# Altium PCB IsoJTAG.PcbDoc
Units mm, origin at the board's own origin, x right, y up, seen from the top; angles counter-clockwise.
Board outline 57.81 x 56.76 mm, 2 copper layers (Top Layer, Bottom Layer), stack 1.571 mm thick; 85 components, 53 nets, 258 pads, 68 vias.
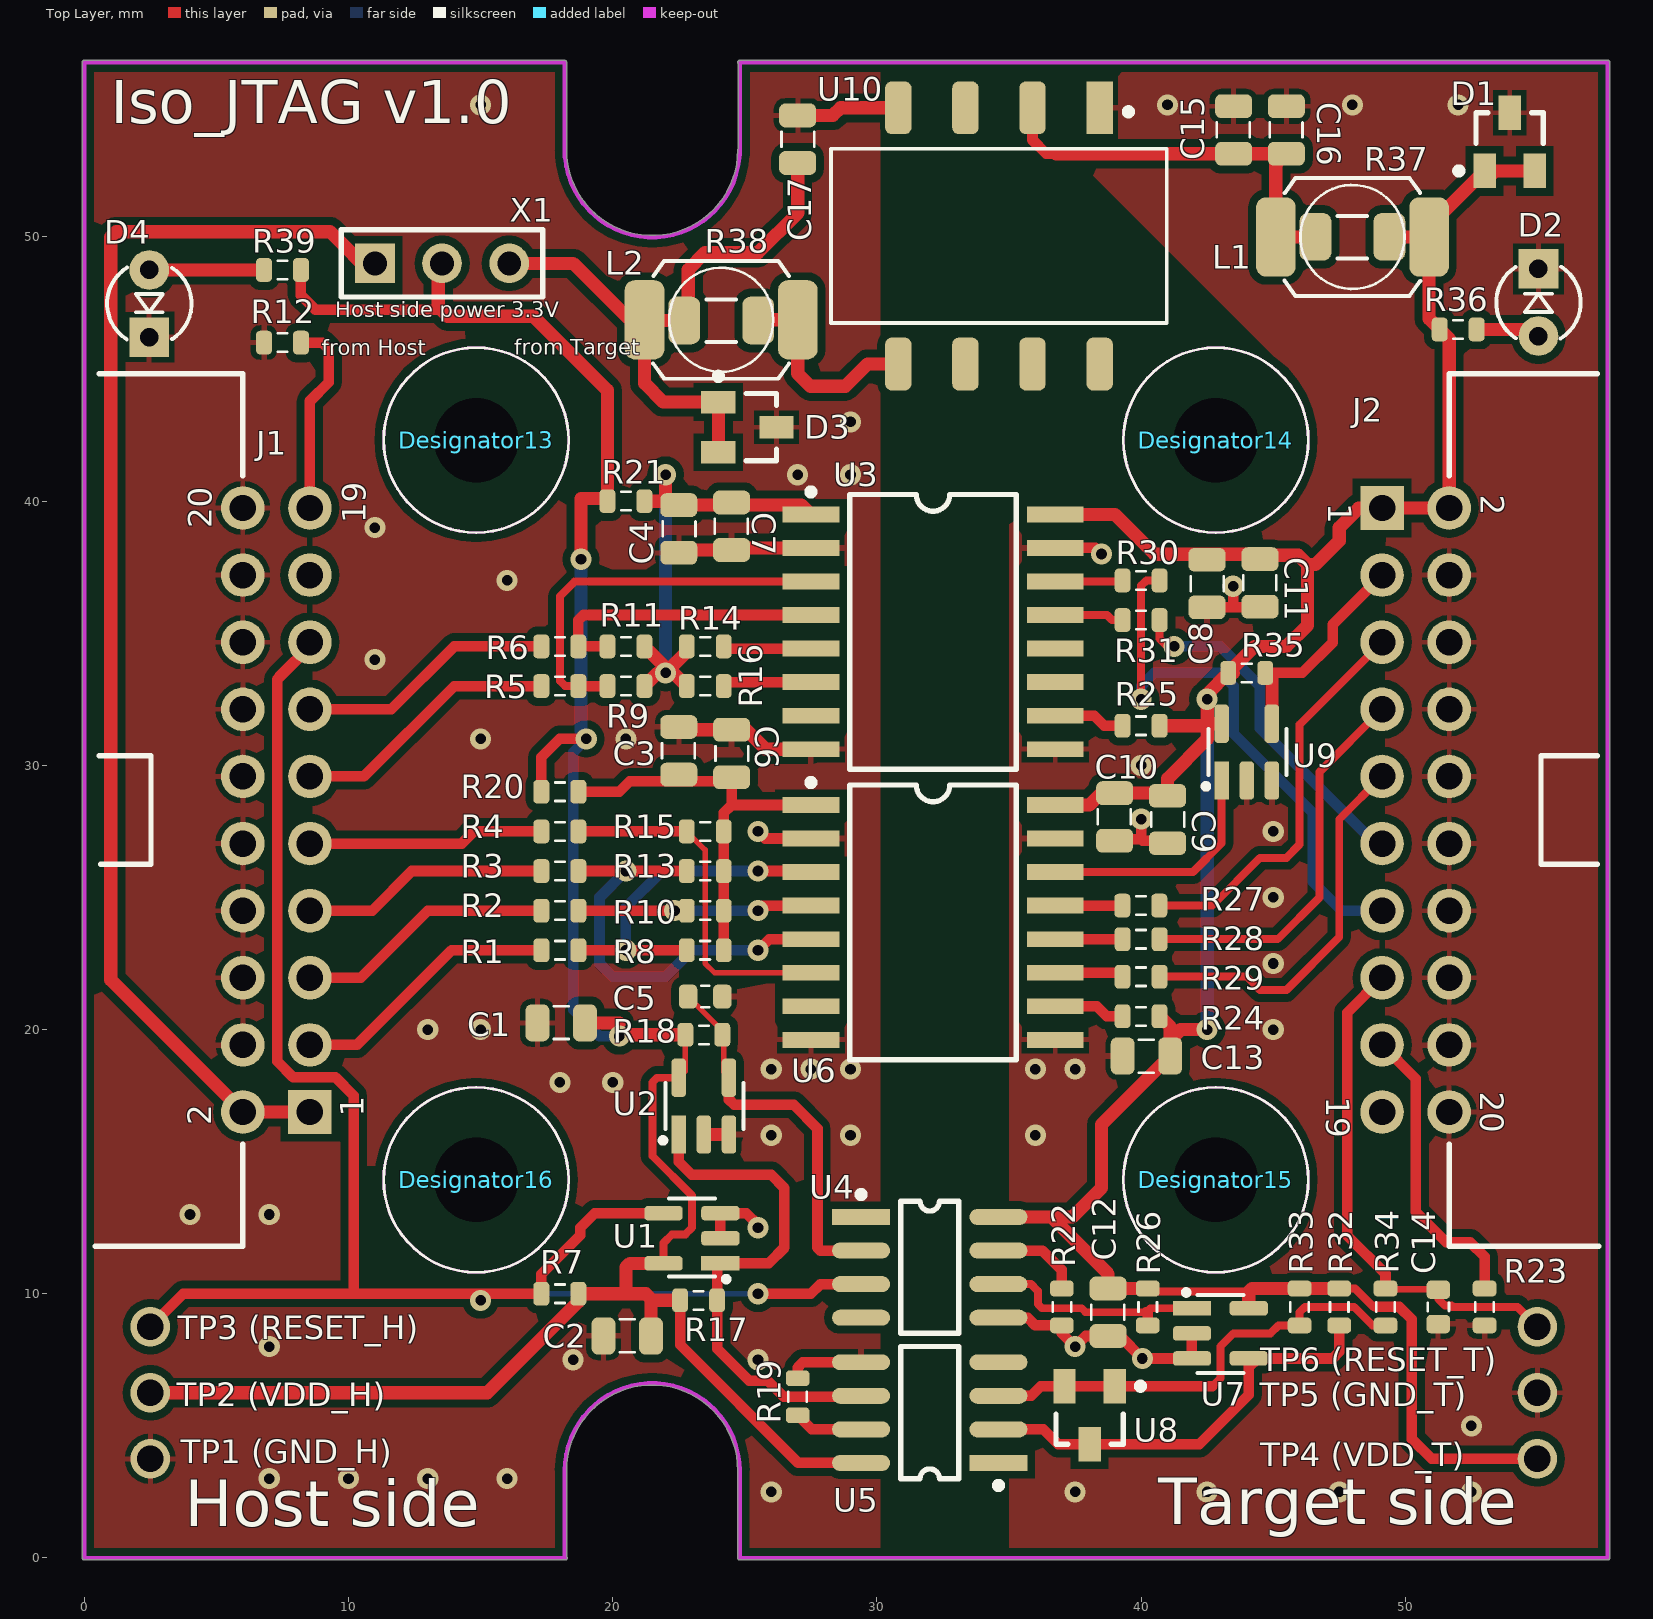
[diagram p0: Top Layer view]
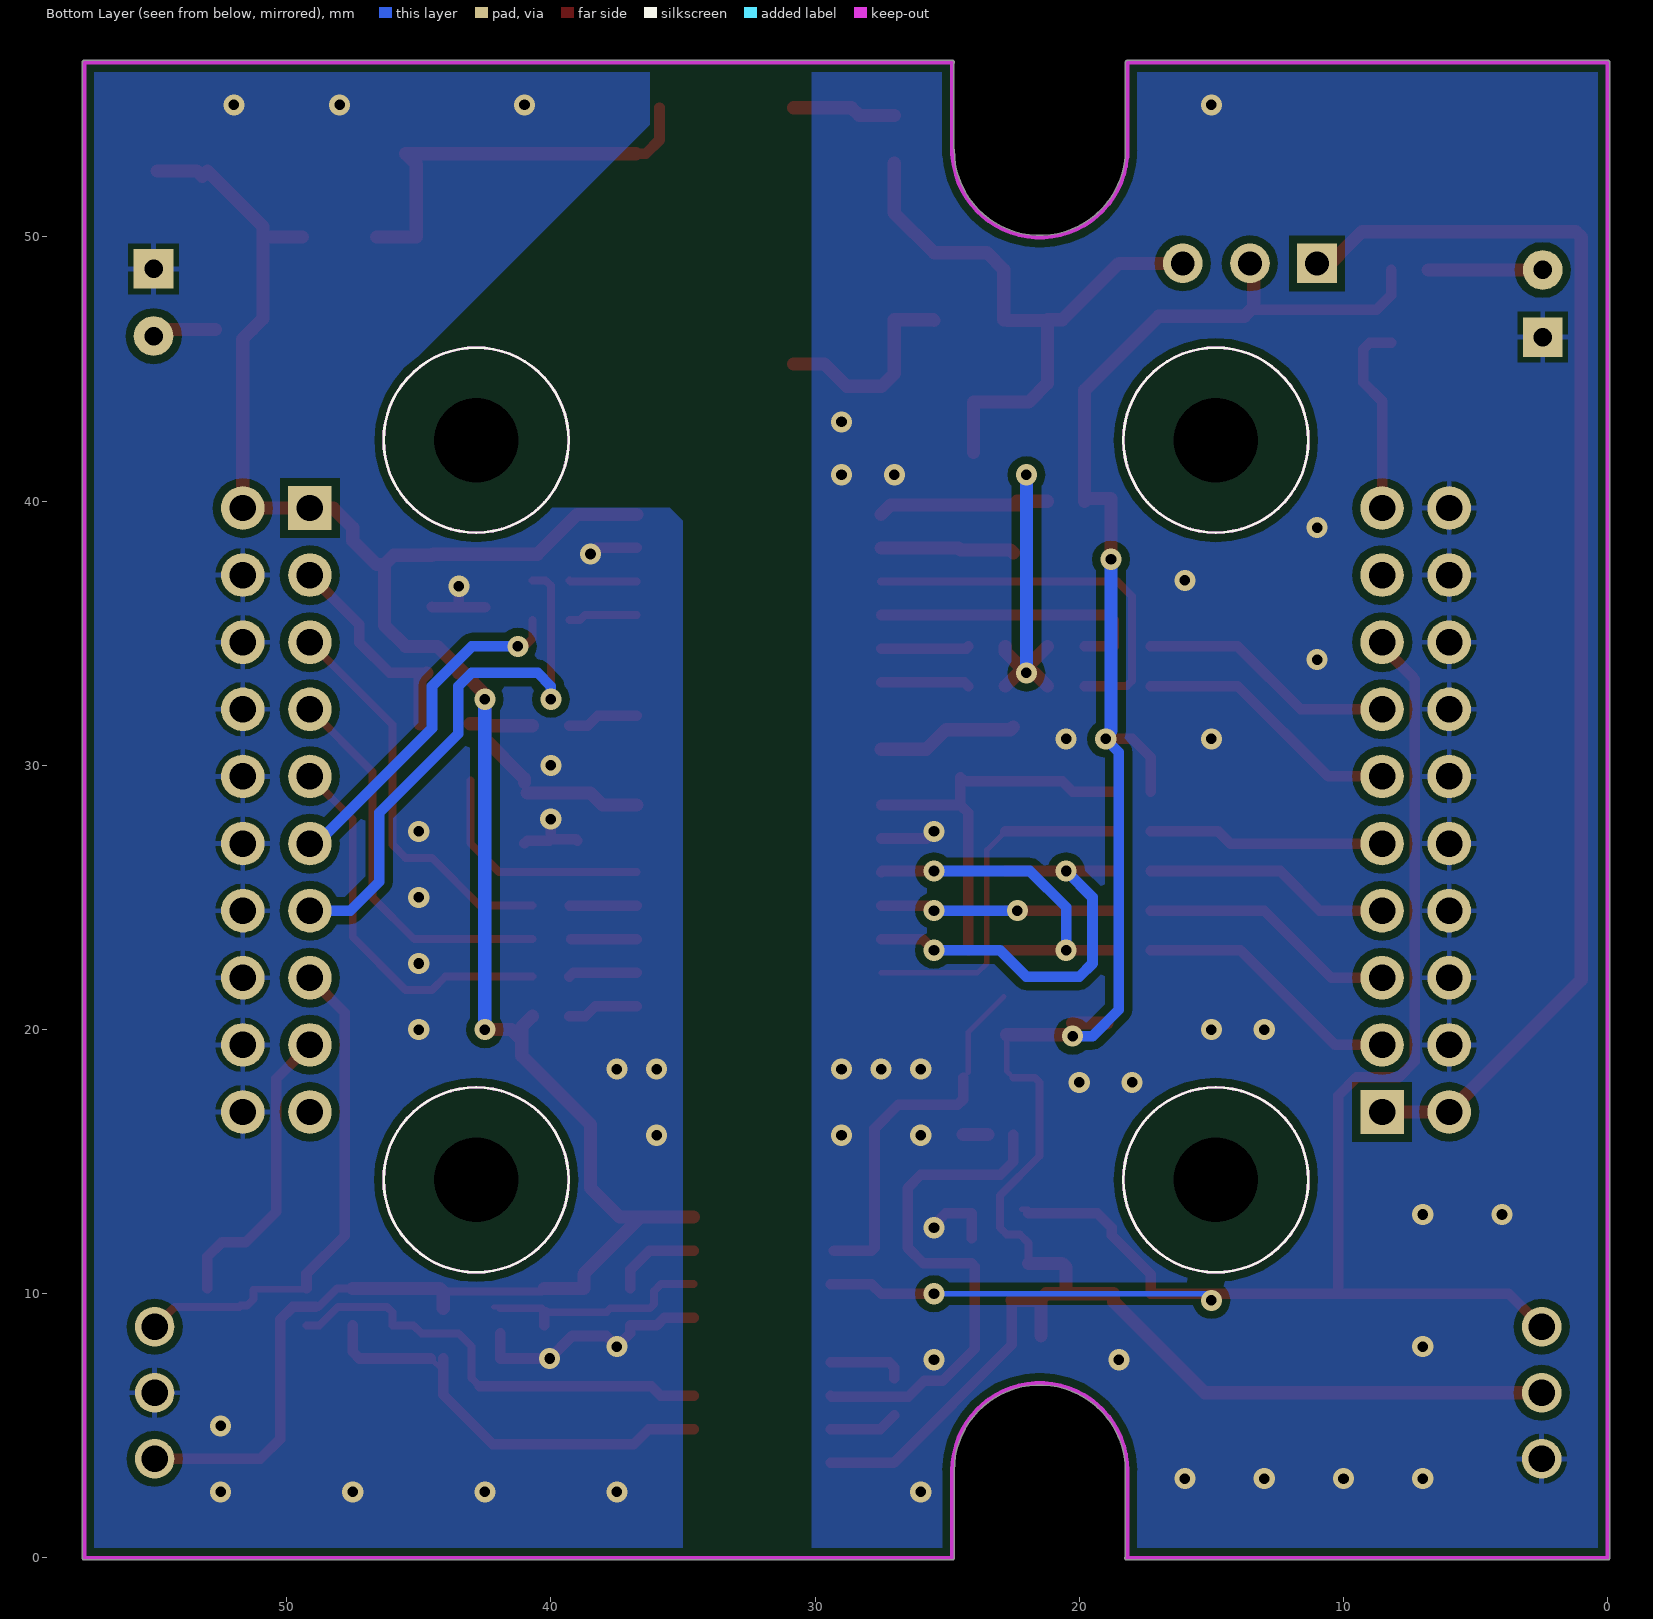
[diagram p1: Bottom Layer view, seen from below]
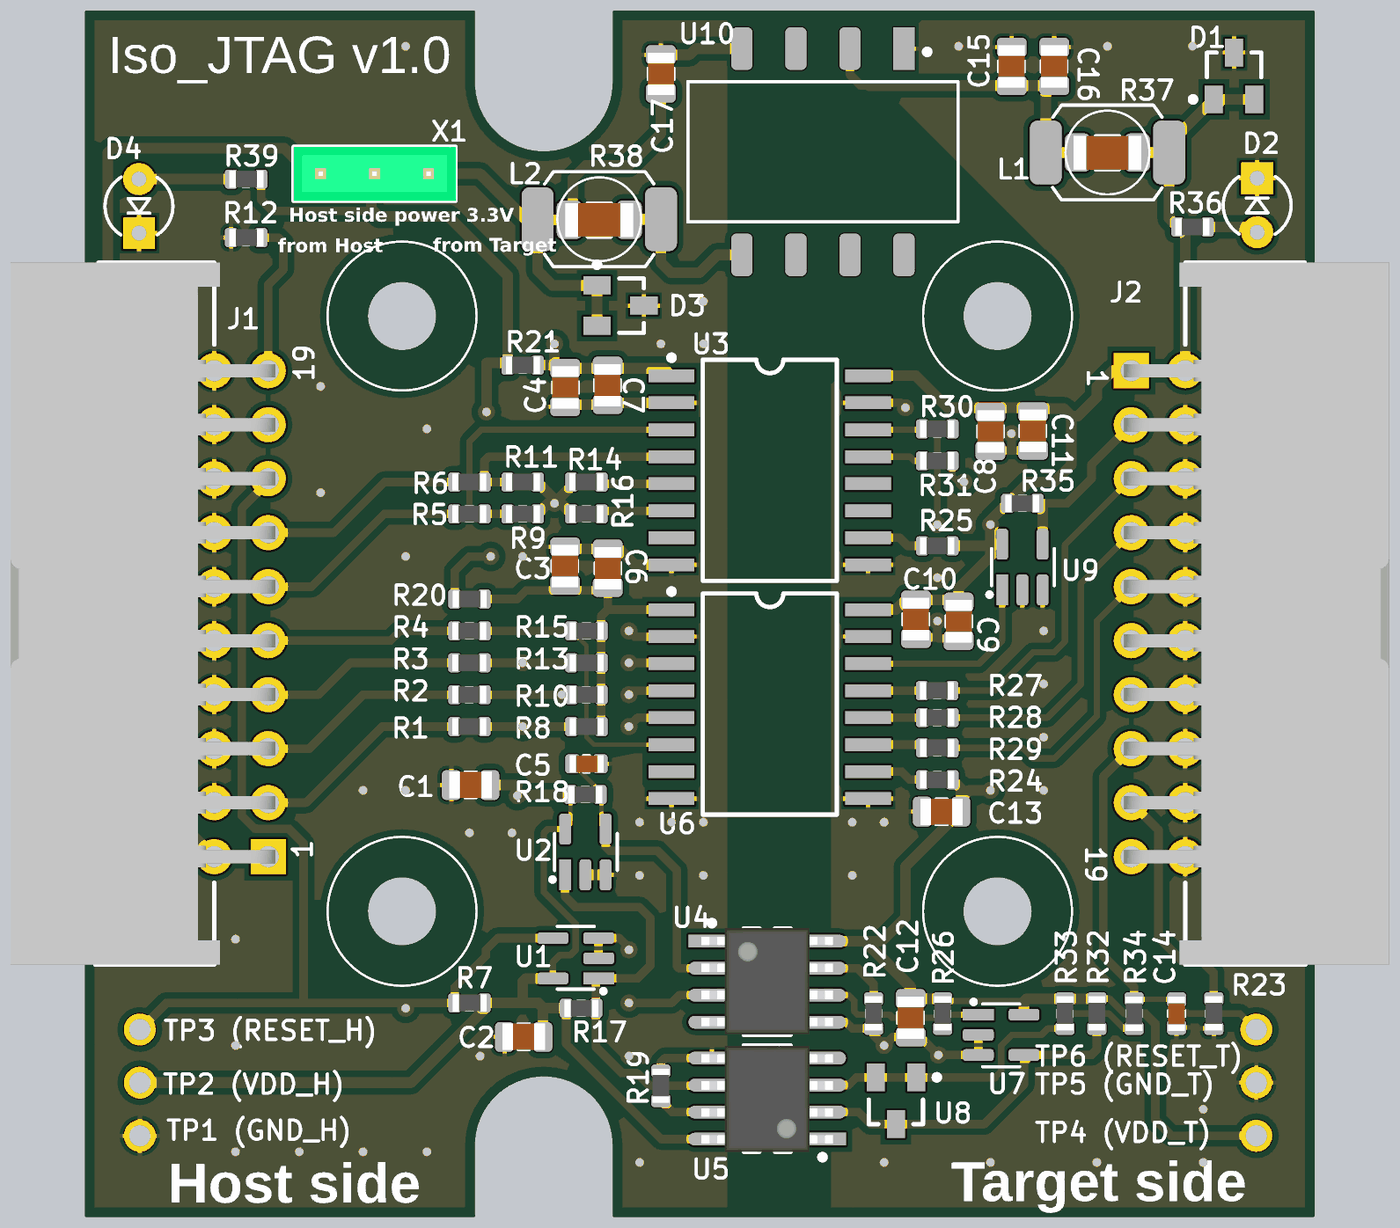
[diagram p2: 3D render of the assembled board from above, using the file's embedded part models]

## Layer stack, top to bottom
Top Solder: solder mask 0.0102, Solder Resist, Dk 3.5
Top Layer: signal copper 0.0356
Dielectric1: core 1.5, FR-4, Dk 4.8
Bottom Layer: signal copper 0.0356
Bottom Solder: solder mask 0.0102, Solder Resist, Dk 3.5

## Board outline
0,-0.075 cw(c0,0) -0.075,0 -0.075,56.61 cw(c0,56.61) 0,56.685 18.18,56.685 cw(c18.18,56.61) 18.255,56.61 18.255,53.295 ccw(c21.495,53.295) 24.735,53.295 cw(c24.81,53.295) 24.745,53.333 24.745,56.572 cw(c24.81,56.61) 24.81,56.685 57.66,56.685 cw(c57.66,56.61) 57.735,56.61 57.735,0 cw(c57.66,0) 57.66,-0.075 24.81,-0.075 cw(c24.81,0) 24.735,0 24.735,3.305 ccw(c24.81,3.305) 24.735,3.304 24.735,3.305 ccw(c21.495,3.305) 18.255,3.305 18.255,0.051 cw(c18.2,0) 18.275,0 cw(c18.2,0) 18.2,-0.075

## Design rules (kind name [scope] priority, off if disabled: settings)
Clearance Clearance_4 [InPolygon] p1: gap=0.3 ignorepadtopadclearanceinfootprint=FALSE except(0: Arc-Hole Track-Hole SMDPad-Hole THPad-Hole Via-Hole Fill-Hole Poly-Hole Region-Hole Text-Hole)
Clearance Clearance_1 [All vs OnLayer('Keep-Out Layer')] p2: gap=0.5 ignorepadtopadclearanceinfootprint=FALSE except(0: Arc-Hole Track-Hole SMDPad-Hole THPad-Hole Via-Hole Fill-Hole Poly-Hole Region-Hole Text-Hole)
Clearance Clearance_2 [InNamedPolygon('GND_H_BOT') vs InNamedPolygon('GND_T_BOT')] p3: gap=6 ignorepadtopadclearanceinfootprint=FALSE except(0: Arc-Hole Track-Hole SMDPad-Hole THPad-Hole Via-Hole Fill-Hole Poly-Hole Region-Hole Text-Hole)
Clearance Clearance_3 [InNamedPolygon('GND_H_TOP') vs InNamedPolygon('GND_T_TOP')] p4: gap=6 ignorepadtopadclearanceinfootprint=FALSE except(0: Arc-Hole Track-Hole SMDPad-Hole THPad-Hole Via-Hole Fill-Hole Poly-Hole Region-Hole Text-Hole)
Clearance [All] p5: gap=0.2 ignorepadtopadclearanceinfootprint=FALSE except(0: Arc-Hole Track-Hole SMDPad-Hole THPad-Hole Via-Hole Fill-Hole Poly-Hole Region-Hole Text-Hole)
ComponentClearance ComponentClearance_2 [InComponent('L2') vs InComponent('R38')] p1: gap=0 collisioncheckmode=3 verticalgap=0 showdistances=FALSE
ComponentClearance ComponentClearance_1 [InComponent('R37') vs InComponent('L1')] p2: gap=0 collisioncheckmode=3 verticalgap=0 showdistances=FALSE
ComponentClearance [All] p3: gap=0.254 collisioncheckmode=3 verticalgap=0.254 showdistances=FALSE
HoleSize [All] p1: absolutevalues=TRUE maxlimit=5 minlimit=0.3 maxpercent=80.000 minpercent=20.000
HoleToHoleClearance [All] p1: gap=0.3 allowstackedmicrovias=TRUE
MinimumSolderMaskSliver [All] p1: minsoldermaskwidth=0
PlaneConnect [All] p1: planeconnectstyle=Direct reliefexpansion=0.508 reliefentries=4 reliefconductorwidth=0.254 reliefairgap=0.254
PolygonConnect Via [IsVia] p1: connectstyle=Direct reliefconductorwidth=0.254 reliefentries=4 polygonreliefangle="90 Angle" airgapwidth=0.254
PolygonConnect [All] p2: connectstyle=Relief reliefconductorwidth=0.2 reliefentries=4 polygonreliefangle="90 Angle" airgapwidth=0.2
RoutingVias [All] p1: holewidth=0.4 width=0.8 viastyle="Through Hole" minholewidth=0.3 minwidth=0.7 maxholewidth=3 maxwidth=4
SilkToSilkClearance [All] p1: silktosilkclearance=0
SilkToSolderMaskClearance SilkscreenOverComponentPads [IsPad] p1: minsilkscreentomaskgap=0 clearancetoexposedcopper=TRUE
SolderMaskExpansion [All] p1: expansion=0.102 istentingtop=FALSE
Width [All] p1: maxlimit=5 minlimit=0.2 preferedwidth=0.3 minimp=50.000000 maximp=50.000000 favimp=50.000000
23 further rules are at their usual default settings.

## Components (designator, comment, footprint, x,y, rotation, side; value= is the part's Value field where it differs from the comment)
C1 "0.1 uF" 2012[0805] 18,20.25 r180 top
C2 "0.1 uF" 2012[0805] 20.5,8.4 r180 top
C3 "0.1 uF" 2012[0805] 22.5,30.5 r270 top
C4 "0.1 uF" 2012[0805] 22.5,39 r90 top
C5 "100 pF" 1608[0603] 23.5,21.25 r0 top
C6 "1 uF" 2012[0805] 24.5,30.5 r90 top
C7 "1 uF" 2012[0805] 24.5,39 r270 top
C8 "0.1 uF" 2012[0805] 42.494,36.932 r90 top
C9 "0.1 uF" 2012[0805] 41,28 r90 top
C10 "1 uF" 2012[0805] 39,28 r270 top
C11 "1 uF" 2012[0805] 44.501,36.855 r270 top
C12 "0.1 uF" 2012[0805] 38.75,9.25 r270 top
C13 "0.1 uF" 2012[0805] 40.25,19 r0 top
C14 "10 pF" 1608[0603] 51.25,9.5 r270 top
C15 "0.1 uF" 2012[0805] 43.5,54 r270 top
C16 "10 uF" 2012[0805] 45.5,54 r270 top
C17 "10 uF" 2012[0805] 27,53.75 r90 top
D1 "ESDA6V1L" SOT23 53,52.5 r0 top
D2 "LTL-4221N" "LED 3 mm" 52.5,46.25 r270 top
D3 "ESDA6V1L" SOT23 24,43.75 r270 top
D4 "LTL-4221N" "LED 3 mm" 5,48.75 r90 top
Designator13 "Comment" Hole_3mm 14.83,42.31 r0 top locked
Designator14 "Comment" Hole_3mm 42.83,42.31 r0 top locked
Designator15 "Comment" Hole_3mm 42.83,14.31 r0 top locked
Designator16 "Comment" Hole_3mm 14.83,14.31 r0 top locked
J1 "20pin header RA" 918520X323 6,28.31 r90 top locked
J2 "20pin header RA" 918520X323 51.66,28.31 r270 top locked
L1 "DL16-10" DL16-10 48,50 r180 top
L2 "DL16-10" DL16-10 24.105,46.863 r180 top
R1 "49.9 R" 0603 18,23 r180 top
R2 "49.9 R" 0603 18,24.5 r180 top
R3 "49.9 R" 0603 18,26 r180 top
R4 "49.9 R" 0603 18,27.5 r180 top
R5 "49.9 R" 0603 18,33 r180 top
R6 "49.9 R" 0603 18,34.5 r180 top
R7 "10 K" 0603 18,10 r0 top
R8 "10 K" 0603 23.5,23 r0 top
R9 "10 K" 0603 20.5,33 r0 top
R10 "10 K" 0603 23.5,24.5 r0 top
R11 "10 K" 0603 20.5,34.5 r0 top
R12 "10 K" 0603 7.5,46 r0 top
R13 "10 K" 0603 23.5,26 r0 top
R14 "10 K" 0603 23.5,34.5 r180 top
R15 "10 K" 0603 23.5,27.5 r0 top
R16 "10 K" 0603 23.5,33 r180 top
R17 "2.2 K" 0603 23.25,9.75 r0 top
R18 "2.2 K" 0603 23.45,19.8 r180 top
R19 "100 K" 0603 27,6.1 r90 top
R20 "49.9 R" 0603 18,29 r0 top
R21 "49.9 R" 0603 20.5,40 r0 top
R22 "100 K" 0603 37,9.5 r90 top
R23 "10 K" 0603 53,9.5 r90 top
R24 "10 K" 0603 40,20.5 r180 top
R25 "10 K" 0603 40,31.5 r180 top
R26 "2.2 K" 0603 40.25,9.5 r90 top
R27 "49.9 R" 0603 39.99,24.69 r180 top
R28 "49.9 R" 0603 40,23.42 r180 top
R29 "49.9 R" 0603 40,22 r180 top
R30 "49.9 R" 0603 40,37 r180 top
R31 "49.9 R" 0603 40,35.5 r180 top
R32 "2.2 K" 0603 47.5,9.5 r90 top
R33 "10 K" 0603 46,9.5 r90 top
R34 "33 R" 0603 49.25,9.5 r270 top
R35 "2.2 K" 0603 44,33.5 r180 top
R36 "RL0603E510-1" 0603 52,46.5 r180 top
R37 "ERJ-8RSFR15V" 3216[1206] 48,50 r0 top
R38 "ERJ-8RSFR15V" 3216[1206] 24.105,46.838 r0 top
R39 "RL0603E510-1" 0603 7.5,48.75 r0 top
"TP1 (GND_H)" "TP 0.4-0.8" "TP 0.4-0.8"#1 2.5,3.75 r0 top (schematic designator TP1)
"TP2 (VDD_H)" "TP 0.4-0.8" "TP 0.4-0.8"#2 2.5,6.5 r0 top (schematic designator TP2)
"TP3 (RESET_H)" "TP 0.4-0.8" "TP 0.4-0.8"#1 2.5,8.75 r0 top (schematic designator TP3)
"TP4 (VDD_T)" "TP 0.4-0.8" "TP 0.4-0.8"#1 55,3.75 r0 top (schematic designator TP4)
"TP5 (GND_T)" "TP 0.4-0.8" "TP 0.4-0.8"#1 55,6.25 r0 top (schematic designator TP5)
"TP6 (RESET_T)" "TP 0.4-0.8" "TP 0.4-0.8"#1 55,8.75 r0 top (schematic designator TP6)
U1 "74V1G125STR" SOT23-5L 23,12.1 r90 top
U2 "74V1G125STR" SOT23-5L 23.45,17.1 r0 top
U3 "SI8440BB-D-IS" SO-G16/D10.4 27.5,39.5 r270 top
U4 "HCPL-0701-000E" SO-8 32,11 r270 top
U5 "HCPL-0701-000E" SO-8 32,5.5 r90 top
U6 "SI8440BB-D-IS" SO-G16/D10.4 27.5,28.5 r270 top
U7 "74V1G125STR" SOT23-5L 43,8.5 r270 top
U8 "BAR42FILM" SOT23 39,6.5 r180 top
U9 "74V1G125STR" SOT23-5L 44,30.5 r0 top
U10 "NTE0303MC" "NTE DC_DC" 34.62,50.038 r180 top
X1 "Pin header 1X3" HDR1X3 11,49 r0 top

## Footprints (in the part's own frame and the unit in brackets; to place one, negate y for a bottom-side part, rotate by r counter-clockwise, add the part's x,y. Pads: shape width x height; smd on the part's side, far side on the other; paste and mask are expansions set on the pad)
0603 [mm] "Chip Resistor; Body 1.6 x 0.8 mm (LxW typ)"
  rrect50% 0.6x0.9 smd mask+0.06: 1(-0.7,0) 2(0.7,0)
  silkscreen extent -0.18,-0.35 0.18,0.35, body extent -0.79,-0.4 0.81,0.4, height 0.45
1608[0603] [mm] "Chip Capacitor; Body 1.6 x 0.8 mm (LxW typ)"
  rrect50% 0.7x0.9 smd mask+0.05: 1(-0.65,0) 2(0.65,0)
  silkscreen extent -0.15,-0.41 0.15,0.41, body extent -0.79,-0.41 0.81,0.39, height 0.8
2012[0805] [mm] "Chip Capacitor; Body 2.0 x 1.2 mm (LxW typ)"
  rrect50% 0.9x1.4 smd mask+0.07: 1(-0.95,0) 2(0.85,0)
  silkscreen extent -0.33,-0.64 0.23,0.61, body extent -1.05,-0.64 0.95,0.62, height 1.25
3216[1206] [mm] "Chip Capacitor; Body 3.2 x 1.6 mm (LxW typ)"
  rrect50% 1.2x1.8 smd: 1(-1.4,0) 2(1.4,0)
  silkscreen extent -0.56,-0.81 0.56,0.79, body extent -1.6,-0.81 1.6,0.79, height 1.15
918520X323 [mm] "Connector; IDC, Low Profile Male Header, Thru-Hole; 20 Position; Right Angle; Pitch 2.54 mm; Body 33.02 x 8.9 x 9.2 mm (LxWxH)"
  rect 1.65x1.65 hole 1: 1(-11.43,-2.54)
  round 1.65 hole 1: 2(-11.43,0) 3(-8.89,-2.54) 4(-8.89,0) 5(-6.35,-2.54) 6(-6.35,0) 7(-3.81,-2.54) 8(-3.81,0) 9(-1.27,-2.54) 10(-1.27,0) 11(1.27,-2.54) 12(1.27,0) 13(3.81,-2.54) 14(3.81,0) 15(6.35,-2.54) 16(6.35,0) 17(8.89,-2.54) 18(8.89,0) 19(11.43,-2.54) 20(11.43,0)
  silkscreen extent -16.51,0 16.51,5.59, body extent -16.51,-2.88 16.51,9.58, height 9.17
DL16-10 [mm] "Inductor 6.6x4.45x2.92mm"
  rrect50% 1.5x3 smd: 1(-2.9,0) 2(2.9,0)
  silkscreen extent -2.57,-2.23 2.58,2.23, body extent -3.3,-2.23 3.3,2.23, height 2.92
HDR1X3 [mm] "Connector; Header; 3 Position"
  rect 1.5x1.5 hole 0.9: 1(0,0)
  round 1.5 hole 0.9: 2(2.54,0) 3(5.08,0)
  silkscreen extent -1.27,-1.27 6.35,1.27, body extent -1.27,-1.27 6.35,1.27, height 9
Hole_3mm [mm]
  round 3 hole 3.2 unplated: 0(0,0)
  Keep-Out Layer circle w0.1: c0,0 r3.5
  silkscreen extent -3.5,-3.5 3.5,3.5
"LED 3 mm" [mm] "LED Diffuse Red 8,7mcd 60° 3mm"
  rect 1.5x1.5 hole 0.7: 1(-2.54,2.54)
  round 1.5 hole 0.7: 2(0,2.54)
  silkscreen extent -2.62,0.94 0.09,4.14
"NTE DC_DC" [mm] "DC_DC 8 pin 12.7*11.20mm"
  rect 1x2 smd mask+0.06: 1(-3.81,-4.85)
  rrect50% 1x2 smd mask+0.06: 3(-1.27,-4.85) 5(1.27,-4.85) 7(3.81,-4.85) 8(3.81,4.85) 10(1.27,4.85) 12(-1.27,4.85) 14(-3.81,4.85)
  silkscreen extent -6.35,-4.82 6.35,3.3, body extent -6.35,-3.3 6.35,3.3, height 6.6
SO-8 [mm] "Small Outline; 8 Leads; Body Width 3.9 mm; Pitch 1.27 mm"
  rect 0.6x2.2 smd: 1(-1.905,-2.6)
  oval 0.6x2.2 smd: 2(-0.635,-2.6) 3(0.635,-2.6) 4(1.905,-2.6) 5(1.905,2.6) 6(0.635,2.6) 7(-0.635,2.6) 8(-1.905,2.6)
  silkscreen extent -2.88,-2.72 2.5,1.1, body extent -2.51,-3.09 2.49,3.09, height 2.16
SO-G16/D10.4 [mm] "Plastic Small Outline; 16 Leads; Body Width 7.5 mm"
  rect 0.6x2.15 smd: 1(0,0) 2(1.27,0) 3(2.54,0) 4(3.81,0) 5(5.08,0) 6(6.35,0) 7(7.62,0) 8(8.89,0) 9(8.89,9.25) 10(7.62,9.25) 11(6.35,9.25) 12(5.08,9.25) 13(3.81,9.25) 14(2.54,9.25) 15(1.27,9.25) 16(0,9.25)
  silkscreen extent -0.97,-0.12 9.64,7.77, body extent -0.76,1.14 9.65,8.13, height 1.5
SOT23 [mm] "SOT-23; 3 Leads; Body 3.0 x 2.6 mm, inc. leads (LxW max)"
  rect 0.85x1.3 smd: 1(0,0) 2(1.9,0) 3(0.95,2.2)
  silkscreen extent -1.1,-0.12 2.23,2.2, body extent -0.3,1 2.2,2.2, height 1
SOT23-5L [mm] "5 Leads; Body 3x3mm, inc. leads (LxW max)"
  rect 0.55x1.45 smd: 1(-0.95,-1.075)
  rrect50% 0.55x1.45 smd: 2(0,-1.075) 3(0.95,-1.075) 4(0.95,1.075) 5(-0.95,1.075)
  silkscreen extent -1.65,-1.4 1.5,0.87, body extent -1.5,-0.86 1.5,0.86, height 1.45
"TP 0.4-0.8"#1 [mm]
  round 1.5 hole 1 mask+0.05: 1(0,0)
"TP 0.4-0.8"#2 [mm]
  round 1.5 hole 1 mask+0.05: 1(0,-0.25)

## Part data
C1 C2 C3 C4 C8 C9 C12 C13 C15: library part "0805, 0.1 uF, 50 V, X7R", "0.1 uF, X7R,  0805"
C5: library part CCPF100K0603, "100 pF, 50V, 5%, NP0, 0603 SMD MLC Capacitor"
C6 C7 C10 C11: library part CVUF001K0805, "1 uF, 16V, 10%, X7R, 0805"
C14: library part CCPF010K0603, "10 pF, 50V, 5%, NP0, 0603 SMD MLC Capacitor"
C16 C17: library part GRM21BR61A106KE19L, "10 uF, 10V, X5R, 10%, 0805,  -55°C..85°C"
D1 D3: "Dual transil array for ESD, 6.1 V, 300 W"
D2 D4: "LED 3 mm"
J1 J2: library part "2-1634689-0 20pin header", "Socket; IDC; male; PIN:20; angled; THT; 1.27mm; Pitch:2.54mm"
L1 L2: library part "DL16-10 10uH", "Inductor: wire; 10uH; Ioper:1.1A; 0.16R; SMD; Isat:1.1A; B:4.45mm"
R1 R2 R3 R4 R5 R6 R20 R21 R27 R28 R29 R30 R31: library part CRCW060349R9FKEA, "49.9 R, 1%, 0.1 W, 0603, SMD Resistor, Taped"
R7 R8 R9 R10 R11 R12 R13 R14 R15 R16 R23 R24 R25 R33: library part RL0603K010-1, "10 K, 1%, 0603, SMD Resistor, Taped"
R17 R18 R26 R32 R35: library part RL0603K002.2-1, "2.2 K, 1%, 0603, SMD Resistor, Taped"
R19 R22: library part RL0603K100-1, "100 K, 1%, 0603, SMD Resistor, Taped"
R34: library part RL0603E033-1, "33 R, 1%, 0603, SMD Resistor, Taped"
R36 R39: "510 R, 1%, 0603, SMD Resistor, Taped"
R37 R38: "0.15 Ohm, 0.25 W, 1% 1206"
U1 U2 U7 U9: library part "74V1G125STR buffer", "Single Bus Buffer (3-State), Non Inverting, 2-5.5V, SOT-23-5, -55-125C,"
U3 U6: library part SI8440AB-D-IS, "IC ISOLATOR 4CH 5.5V 16-SOIC"
U4 U5: "OPTOCOUPLER, SMD, TRANSISTOR O/P"
U8: "Schottky Single 30V, 100 mA, 400mV, SOT-23, Marking D94"
U10: library part "NTE0303MC DC/DC", "CONVERTER, DC/DC, SMD, 1W, 3.3V,  12,7x6.6x7.7mm, 1kV isol"

## Via types
v1: diameter 0.8, hole 0.4, Top Layer to Bottom Layer, tented both sides, 68 vias

## Nets (pads, with @x,y where several pads share a name; then routed paths per layer and width w, separated by ;. In a path a pad name is that pad's centre, name@x,y a point inside that pad or via, vN(x,y) a via of type N, cw(c..) or ccw(c..) an arc to the next point about the centre after c; other vN are vias at no path point)
GND_H: "TP1 (GND_H).1" C1.2 C2.2 C3.1 C4.1 C5.2 C6.2 C7.2 C17.2 D3.3 D4.1 J1.4 J1.6 J1.8 J1.10 J1.12 J1.14 J1.16 J1.18 J1.20 R12.1 R19.2 U1.2 U1.3 U2.2 U2.3 U3.2 U3.8 U5.5 U6.2 U6.8 U10.7 | length 23
  Top Layer w0.4: U1.2 U1.3 25.05,13.05 25.5,12.6 v1(25.5,12.5) ; v1(25.5,27.5) 25.77,27.23 U6.2 ; R19.2 27,7.207 27.198,7.405 U5.5
  Top Layer w0.5: C3.1 22.6,31.35 C6.2 25.05,31.35 25.79,30.61 U3.8 ; C4.1 22.6,38.15 C7.2 24.58,38.23 U3.2 ; U2.2 U2.3 ; C17.2 28.336,54.6 28.624,54.888 U10.7
  other v1: 26,2.5 7,3 10,3 13,3 16,3 18.5,7.5 25.5,7.5 7,8 4,13 7,13 26,16 29,16 18,18 20,18 26,18.5 27.5,18.5 29,18.5 13,20 15,20 15,31 20.5,31 11,34 16,37 11,39 27,41 29,41 29,43 15,55
GND_T: "TP5 (GND_T).1" C8.1 C9.1 C10.2 C11.2 C12.2 C13.1 C14.2 C15.1 C16.1 D1.3 D2.1 J2.4 J2.6 J2.8 J2.10 J2.12 J2.14 J2.16 J2.18 J2.20 R22.1 R23.1 U3.9 U3.15 U4.5 U6.9 U6.15 U7.2 U7.3 U9.2 U9.3 U10.1 | length 16.9
  Top Layer w0.4: U4.5 35.705,9.095 36,8.8 R22.1 37,8.5 v1(37.5,8) 37.9,8.4 C12.2 39.2,8.4 v1(40.05,7.55) U7.3 U7.2 ; U3.15 38.27,38.23 v1(38.5,38) ; C10.2 39.051,27.201 40.005,27.201 ; v1(40.005,27.965) 40.005,27.201 ; C9.1 40.9,27.15 40.056,27.15 40.005,27.201 ; C8.1 43.51,35.982 ; v1(43.485,36.779) 43.485,36.007 43.51,35.982 ; C11.2 44.477,35.982 43.51,35.982
  other v1: 37.5,2.5 42.5,2.5 47.5,2.5 52.5,2.5 52.5,5 36,16 36,18.5 37.5,18.5 45,20 45,22.5 45,25 45,27.5 40,30 41,55 48,55 52,55
NetC3_2: C3.2 C6.1 R8.2 R10.2 R13.2 R15.2 R20.2 U6.1 | length 15.7
  Top Layer w0.2: C6.1@24.45,29.5 C6.1@24.5,29.5
  Top Layer w0.4: R20.2 20.25,29 20.65,29.4 22.5,29.4 24.35,29.4 24.45,29.5 C6.1 ; R8.2 R15.2 24.2,28.2 24.5,28.5 ; C6.1@24.5,29.5 24.5,28.5 ; U6.1 24.5,28.5
NetC4_2: C4.2 C7.1 R9.2 R11.2 R14.2 R16.2 R21.2 U3.1 | length 20.3
  Top Layer w0.5: R9.2 21.7,33.5 v1(22,33.5) ; R11.2 22,33.7 v1(22,33.5) ; R21.2 C4.2@22,40 ; v1(22,41) C4.2@22,40 ; R16.2 22.3,33.5 v1(22,33.5) ; R14.2 22.8,34.3 v1(22,33.5) ; U3.1 27.15,39.85 C4.2 ; C4.2@22,40 22,39.85 C4.2 ; C4.2@22,40 22.35,40 C4.2
  Bottom Layer w0.5: v1(22,33.5) v1(22,41)
NetC5_1: C5.1 R18.1 U2.4 U4.2 | length 14.1
  Top Layer w0.2: C5.1 24.2,19.9 U2.4@24.2,18.375
  Top Layer w0.4: U2.4 24.4,17.675 24.4,17.35 24.6,17.15 24.925,17.15 26.85,17.15 27.75,16.25 27.75,15.75 27.75,11.75 27.865,11.635 U4.2@29.285,11.635
NetC14_1: "TP6 (RESET_T).1" C14.1 J2.15 R34.1 | length 21.5
  Top Layer w0.2: C14.1 49.3,10.15 R34.1 C14.1@51.25,10.2
  Top Layer w0.3: C14.1 51.25,9.8 51.5,9.55 51.742,9.55 51.792,9.5 54.25,9.5 55,8.75
  Top Layer w0.4: J2.15 47.8,20.64 47.8,12.2 49.25,10.75 R34.1
NetC15_2: C15.2 C16.2 L1.2 R37.1 U10.3 | length 15.9
  Top Layer w0.4: U10.3 35.89,53.67 36.41,53.15 36.791,53.15
  Top Layer w0.5: 36.791,53.15 C15.2 C16.2 45.1,52.75 L1.2 R37.1
NetC17_1: C17.1 D3.1 D3.2 L2.2 R38.1 X1.3 | length 23.7
  Top Layer w0.5: X1.3 18.5,49 20.637,46.863 L2.2 ; R38.1 21.23,46.838 L2.2 ; R38.1@22.857,46.863 22.857,48.765 23.492,49.4 25.499,49.4 27,50.901 C17.1 ; D3.2 D3.1 21.909,43.75 21.205,44.454 L2.2
NetD2_2: D2.2 R36.1 | length 2.4
  Top Layer w0.5: R36.1 54.79,46.5 D2.2
NetD4_2: D4.2 R39.1 | length 4.3
  Top Layer w0.5: D4.2 R39.1
NetJ1_3: J1.3 R1.2 | length 10.2
  Top Layer w0.4: J1.3 10.32,19.42 13.9,23 R1.2
NetJ1_5: J1.5 R2.2 | length 9.8
  Top Layer w0.4: J1.5 10.46,21.96 13,24.5 R2.2
NetJ1_7: J1.7 R3.2 | length 9.4
  Top Layer w0.4: J1.7 10.9,24.5 12.4,26 R3.2
NetJ1_9: J1.9 R4.2 | length 9
  Top Layer w0.4: J1.9 14.29,27.04 14.75,27.5 R4.2
NetJ1_11: J1.11 R5.2 | length 10.2
  Top Layer w0.4: J1.11 10.58,29.58 14,33 R5.2
NetJ1_13: J1.13 R6.2 | length 9.7
  Top Layer w0.4: J1.13 11.62,32.12 14,34.5 R6.2
NetJ1_15: "TP3 (RESET_H).1" J1.15 R7.1 U1.4 U4.3 | length 66.1
  Top Layer w0.2: 7.3,33.25 7.3,33.42 J1.15 ; U1.4@21.925,13.2 U1.4@22.175,13.2
  Top Layer w0.4: 2.5,8.75 3.75,10 10.2,10 ; J1.15 8.54,34.49 7.3,33.25 7.3,18.8 7.9,18.2 8.028,18.2 8.033,18.195 9.505,18.195 10.2,17.5 10.2,10 ; U1.4 19.325,13.05 18.775,12.5 18.775,12.216 17.3,10.741 R7.1 10.2,10 ; v1(25.5,10) 27.5,10 27.865,10.365 U4.3
  Bottom Layer w0.2: v1(15,9.75) 15,10 v1(25.5,10)
NetJ1_17: J1.17
NetJ1_19: J1.19 R12.2 | length 7.5
  Top Layer w0.4: R12.2 9,46 9.25,45.75 9.25,44.5 8.54,43.79 J1.19
NetJ2_3: J2.3 R35.1 U9.4 | length 8.4
  Top Layer w0.4: R35.1 46.1,33.5 47.25,34.65 47.25,35.33 J2.3
  Top Layer w0.5: R35.1 44.95,33.25 U9.4
NetJ2_5: J2.5 R27.1 | length 15.2
  Top Layer w0.3: R27.1 42.69,24.69 44.5,26.5 45.5,26.5 46,27 46,31.54 J2.5
NetJ2_7: J2.7 R28.1 | length 14.8
  Top Layer w0.3: R28.1 45.17,23.42 46.75,25 46.75,29.75 J2.7
NetJ2_9: J2.9 R29.1 | length 14.6
  Top Layer w0.3: R29.1 44,22 44.5,21.5 45.5,21.5 47.5,23.5 47.5,27.96 J2.9
NetJ2_11: J2.11 R31.1 | length 13.3
  Top Layer w0.3: R31.1 40.7,34.8 41,34.5 v1(41.25,34.5)
  Bottom Layer w0.4: v1(41.25,34.5) 43,34.5 44.5,33 44.5,31.4 48.86,27.04 J2.11
NetJ2_13: J2.13 R30.1 | length 21.2
  Top Layer w0.3: v1(40,32.5) 40,36.8 40.2,37 R30.1
  Bottom Layer w0.4: v1(40,32.5) 40,33 40.5,33.5 43,33.5 43.5,33 43.5,31.2 46.5,28.2 46.5,25.6 47.6,24.5 J2.13
NetJ2_17: J2.17 R23.2 | length 11.4
  Top Layer w0.4: J2.17 50.4,18.14 50.4,13.1 51.55,11.95 52.45,11.95 53,11.4 R23.2
NetJ2_19: J2.19
NetL2_1: L2.1 R38.2 U10.8 | length 7.9
  Top Layer w0.5: R38.2 25.53,46.863 L2.1 27.005,44.827 27.483,44.348 28.804,44.348 29.643,45.188 U10.8
NetR1_1: R1.1 R8.1 U6.3 | length 13.3
  Top Layer w0.4: R1.1 v1(20.5,23) R8.1 ; v1(25.5,26) 27.46,26 U6.3
  Bottom Layer w0.4: v1(20.5,23) 20.5,24.631 21.869,26 v1(25.5,26)
NetR2_1: R2.1 R10.1 U6.4 | length 9.3
  Top Layer w0.4: R2.1 R10.1 ; v1(25.5,24.5) 25.69,24.69 U6.4
  Bottom Layer w0.4: v1(22.341,24.5) v1(25.5,24.5)
NetR3_1: R3.1 R13.1 U6.5 | length 16.8
  Top Layer w0.4: R3.1 R13.1 ; v1(25.5,23) 25.92,23.42 U6.5
  Bottom Layer w0.4: v1(20.5,26) 19.5,25 19.5,22.5 20,22 22,22 23,23 v1(25.5,23)
NetR4_1: R4.1 R15.1 U6.6 | length 13.5
  Top Layer w0.2: R15.1 23.5,26.8 23.5,22.5 23.85,22.15 U6.6
  Top Layer w0.4: R4.1 R15.1
NetR5_1: R5.1 R9.1 U3.3 | length 14.8
  Top Layer w0.3: R5.1 18.2,33 18,33.2 18,36.4 18.56,36.96 U3.3
  Top Layer w0.4: R5.1 R9.1
NetR6_1: R6.1 R11.1 U3.4 | length 11
  Top Layer w0.4: R11.1 R6.1 18.7,35.49 18.9,35.69 U3.4
NetR14_1: R14.1 U3.5 | length 3.3
  Top Layer w0.4: R14.1 24.28,34.42 U3.5
NetR16_1: R16.1 U3.6 | length 3.4
  Top Layer w0.4: R16.1 24.35,33.15 U3.6
NetR17_2: R17.2 U1.1 U2.1 U5.6 | length 19.9
  Top Layer w0.4: U2.1 22.5,14.997 22.997,14.5 26,14.5 26.5,14 26.5,11.75 25.9,11.15 U1.1 23.95,11.025 R17.2 23.95,7.919 25.169,6.7 25.872,6.7 26.472,6.1 29.365,6.1 U5.6
NetR19_1: R19.1 U5.7 | length 2.6
  Top Layer w0.4: R19.1 27.535,4.865 U5.7
NetR22_2: R22.2 U4.7 | length 3.4
  Top Layer w0.4: U4.7 36.265,11.635 37,10.9 R22.2
NetR24_2: R24.2 U6.10 | length 2.7
  Top Layer w0.4: U6.10 38.32,20.88 38.7,20.5 R24.2
NetR25_2: R25.2 U3.10 | length 2.7
  Top Layer w0.4: U3.10 38.22,31.88 38.6,31.5 R25.2
NetR26_1: R26.1 U4.6 U7.1 | length 9.6
  Top Layer w0.2: U7.1@41.2,9.45 41.25,9.5 U7.1@42.175,9.5
  Top Layer w0.3: U4.6 35.835,10.365 36.092,10.108 36.092,9.608 36.25,9.45 37.75,9.45 37.9,9.3 40.2,9.3 40.35,9.45 41.2,9.45 U7.1
  Top Layer w0.4: 40.2,9.3 40.25,9.25 R26.1
NetR27_2: R27.2 U6.13 | length 2.5
  Top Layer w0.4: U6.13 R27.2
NetR28_2: R28.2 U6.12 | length 2.5
  Top Layer w0.2: R28.2@39.26,23.46 R28.2@39.3,23.5
  Top Layer w0.4: U6.12 R28.2@39.22,23.42
NetR29_2: R29.2 U6.11 | length 2.6
  Top Layer w0.4: U6.11 39.15,22.15 R29.2
NetR30_2: R30.2 U3.14 | length 2.6
  Top Layer w0.3: U3.14 39.26,36.96 R30.2
NetR31_2: R31.2 U3.13 | length 2.6
  Top Layer w0.3: U3.13 38.71,35.69 38.9,35.5 R31.2
NetR32_1: R32.1 U5.2 U7.4 U8.3 | length 16.6
  Top Layer w0.2: 44.075,7.075 U7.4@44.55,7.55
  Top Layer w0.4: U5.2 36.3,4.865 36.865,4.3 U8.3 42.2,4.3 44.075,6.175 44.075,7.075 U7.4 ; U7.4@44.55,7.55 47.25,7.55 47.5,7.8 R32.1
NetR33_1: R33.1 R34.2 U5.3 U8.1 U8.2 | length 17.3
  Top Layer w0.3: 42.7,6.5 43,6.8 43,8 43.5,8.5 44.9,8.5 45.2,8.8 R33.1 46,9.3 46.2,9.5 48.064,9.5 48.764,8.8 R34.2
  Top Layer w0.4: U5.3 35.835,6.135 36.2,6.5 U8.1 42.7,6.5
NetU6_14: U6.14 U9.1 | length 9.1
  Top Layer w0.3: U6.14 41.96,25.96 43.05,27.05 U9.1
VDD_H: "TP2 (VDD_H).1" C1.1 C2.1 R7.2 R17.1 R18.2 R20.1 R21.1 R39.2 U1.5 U2.5 U5.8 X1.2 | length 96.4
  Top Layer w0.2: 13.395,47.5 13.54,47.5 ; U2.5 22.75,18.425 R18.2
  Top Layer w0.3: U1.5 21.925,11.925 22.25,12.25 22.75,12.25 23,12.5 23,13.719 21.5,15.219 21.5,18 21.675,18.175 U2.5
  Top Layer w0.4: R39.2 8.2,47.8 8.75,47.25 13.29,47.25 13.395,47.355 ; R20.1 17.3,30.3 18,31 v1(19,31) ; R17.1 22.55,8.062 27.017,3.595 U5.8
  Top Layer w0.5: 2.5,6.25 15.25,6.25 18.7,9.7 R7.2 20.5,10 ; 13.395,47.355 13.75,47 17,47 19.8,44.2 R21.1 ; 13.395,47.5 X1.2@13.395,48.855 ; v1(18.8,37.8) 18.8,40.1 R21.1@19.7,40.1 ; C1.1 20.25,20.25 ; v1@20.25,19.8 R18.2 ; C2.1 21.45,9.8 ; U1.5 20.65,11.15 20.5,11 20.5,10 ; R17.1 21.5,9.75 21.45,9.8 ; 20.5,10 21.25,10 21.45,9.8
  Bottom Layer w0.4: v1(19,31) 18.5,30.5 18.5,20.75 19.5,19.75 v1(20.25,19.75)
  Bottom Layer w0.5: v1@18.8,31.3 v1(18.8,37.8)
VDD_H_EXT: J1.1 J1.2 X1.1 | length 48.5
  Top Layer w0.5: J1.1 J1.2 1,21.88 1,50 1.2,50.2 9.3,50.2 X1.1@11,48.5
VDD_T: "TP4 (VDD_T).1" C8.2 C9.2 C10.1 C11.1 C12.1 C13.2 D1.1 D1.2 J2.1 J2.2 L1.1 R24.1 R25.1 R26.2 R32.2 R33.2 R35.2 R36.2 R37.2 U3.16 U4.8 U6.16 U7.5 U9.5 | length 104.2
  Top Layer w0.3: R26.2 40.36,10.09 44.06,10.09 44.075,10.075 ; R32.2 48.093,10.2 48.793,9.5 48.9,9.5
  Top Layer w0.4: 48.9,9.5 49.778,9.5 50.25,9.028 50.25,4.5 51,3.75 55,3.75
  Top Layer w0.5: U4.8 36.595,12.905 ; U6.16 38.05,28.5 38.5,28.95 C10.1 C9.2@40.9,28.95 ; U3.16 39,39.5 40.511,37.989 44.461,37.989 44.5,37.95 45.95,37.95 46.3,37.6 ; R26.2 C12.1 38.75,10.75 36.595,12.905 ; R24.1 41.1,20.1 C13.2@41.1,19.6 ; R25.1 42.5,31.5 ; 41,29.35 41,29.5 42.5,31 42.5,31.5 ; v1(42.5,20) 41.5,20 C13.2@41.1,19.6 ; U9.5 42.575,31.575 42.5,31.5 ; R35.2@43.5,33.5 R35.2 ; U7.5 44.075,10.075 44.2,10.2 R33.2 R32.2 ; R37.2 L1.1 ; D1.1 50.9,50.4 L1.1 ; D1.1@53.2,52.3 53.4,52.5 D1.2 ; 36.595,12.905 37.405,12.905 38.5,14 38.5,16.4 C13.2 C13.2@41.1,19.6 ; 42.5,31.5 v1(42.5,32.5) 42.5,32.7 R35.2 ; R35.2 44.3,34.5 45.5,34.5 46.3,35.3 46.3,37.6 ; 46.3,37.6 46.6,37.6 47.5,38.5 47.5,39 48.24,39.74 J2.1 J2.2 51.66,46.14 R36.2 50.9,46.9 L1.1
  Bottom Layer w0.5: v1(42.5,20) v1(42.5,32.5)
pads on no net: Designator13.0 Designator14.0 Designator15.0 Designator16.0 U3.7 U3.11 U3.12 U4.1 U4.4 U5.1 U5.4 U6.7 U10.5 U10.10 U10.12 U10.14

## Polygon pours and split planes (outlines as drawn)
GND_H on Bottom Layer "GND_H_BOT" (solid, remove dead copper, pour order 14): 29.875,56.55 30.125,56.3 30.125,-0.05 24.875,-0.05 24.825,0 24.875,0.05 24.875,4.125 24.875,4.5 22.75,6.625 22.725,6.65 20.375,6.65 20.225,6.65 18.225,4.65 18.18,4.605 18.18,0.025 0.075,0.025 0.05,0 0.05,56.55 0,56.6 0.01,56.61 18.175,56.61 18.175,52.05 20.25,49.975 20.275,49.95 22.6,49.95 22.65,49.95 24.675,51.975 24.82,52.12 24.82,56.6 29.85,56.6 29.875,56.575
GND_T on Bottom Layer "GND_T_BOT" (solid, remove dead copper, pour order 12): 57.66,0 35,0 35,39.25 35.5,39.75 45.5,39.75 45.5,45 36.25,54.25 36.25,56.61 57.66,56.61
GND_H on Top Layer "GND_H_TOP" (solid, remove dead copper, pour order 13): 29.875,56.55 30.125,56.3 30.125,-0.05 24.875,-0.05 24.825,0 24.875,0.05 24.875,4.125 24.875,4.5 22.75,6.625 22.725,6.65 20.375,6.65 20.225,6.65 18.225,4.65 18.18,4.605 18.18,0.025 0.075,0.025 0.05,0 0.05,56.55 0,56.6 0.01,56.61 18.175,56.61 18.175,52.05 20.25,49.975 20.275,49.95 22.6,49.95 22.65,49.95 24.675,51.975 24.82,52.12 24.82,56.6 29.85,56.6 29.875,56.575
GND_T on Top Layer "GND_T_TOP" (solid, remove dead copper, pour order 11): 57.66,0 35,0 35,39.25 35.5,39.75 45.5,39.75 45.5,45 36.25,54.25 36.25,56.61 57.66,56.61

## Keep-outs
Keep-Out Layer:
  lines w0.15: 18.18,0 18.18,3.305 cw(c21.495,3.305) 24.81,3.305 24.81,0 57.66,0 57.66,56.61 24.81,56.61 ; 18.18,53.025 18.18,56.61 0,56.61 0,0 18.2,0 ; 18.18,53.295 ccw(c21.495,53.295) 24.81,53.295 ; 24.82,53.1 24.82,56.61

## Silkscreen, mask and mechanical layers (free items; w line width, h text height)
Top Overlay:
  text "Iso_JTAG v1.0" at 1,53.75 h2.8
  text "Host side power 3.3V" at 9.5,46.75 h1
  text "from Target" at 16.281,45.339 h1
  text "from Host" at 8.992,45.314 h1
  text "Target side" at 40.64,0.686 h3
  text "Host side" at 3.81,0.61 h3
Mechanical 1:
  lines w0.15: 18.18,0 18.18,3.305 cw(c21.495,3.305) 24.81,3.305 24.81,0 57.66,0 57.66,56.61 24.81,56.61 ; 18.18,53.025 18.18,56.61 0,56.61 0,0 18.2,0 ; 18.18,53.295 ccw(c21.495,53.295) 24.81,53.295 ; 24.82,53.1 24.82,56.61
Mechanical 13:
  lines w0.15: 18.18,0 18.18,3.305 cw(c21.495,3.305) 24.81,3.305 24.81,0 57.66,0 57.66,56.61 24.81,56.61 ; 18.18,53.025 18.18,56.61 0,56.61 0,0 18.2,0 ; 18.18,53.295 ccw(c21.495,53.295) 24.81,53.295 ; 24.82,53.1 24.82,56.61

## Text inside footprints (layer, text, board x,y; h text height)
J1: Top Overlay "19" at 10.648,39.156 h0.9 r90; Top Overlay "20" at 4.832,38.978 h0.9 r90; Top Overlay "1" at 10.572,16.702 h0.9 r90; Top Overlay "2" at 4.8,16.38 h0.9 r90
J2: Top Overlay "2" at 52.86,40.24 h0.9 r270; Top Overlay "1" at 47.088,39.918 h0.9 r270; Top Overlay "20" at 52.828,17.642 h0.9 r270; Top Overlay "19" at 47.012,17.464 h0.9 r270